# Altium PCB mini_drone.PcbDoc
Units mm, origin at the board's own origin, x right, y up, seen from the top; angles counter-clockwise.
Board outline 53.26 x 58.04 mm, 2 copper layers (Top Layer, Bottom Layer), stack 1.57 mm thick; 31 components, 18 nets, 90 pads, 0 vias.
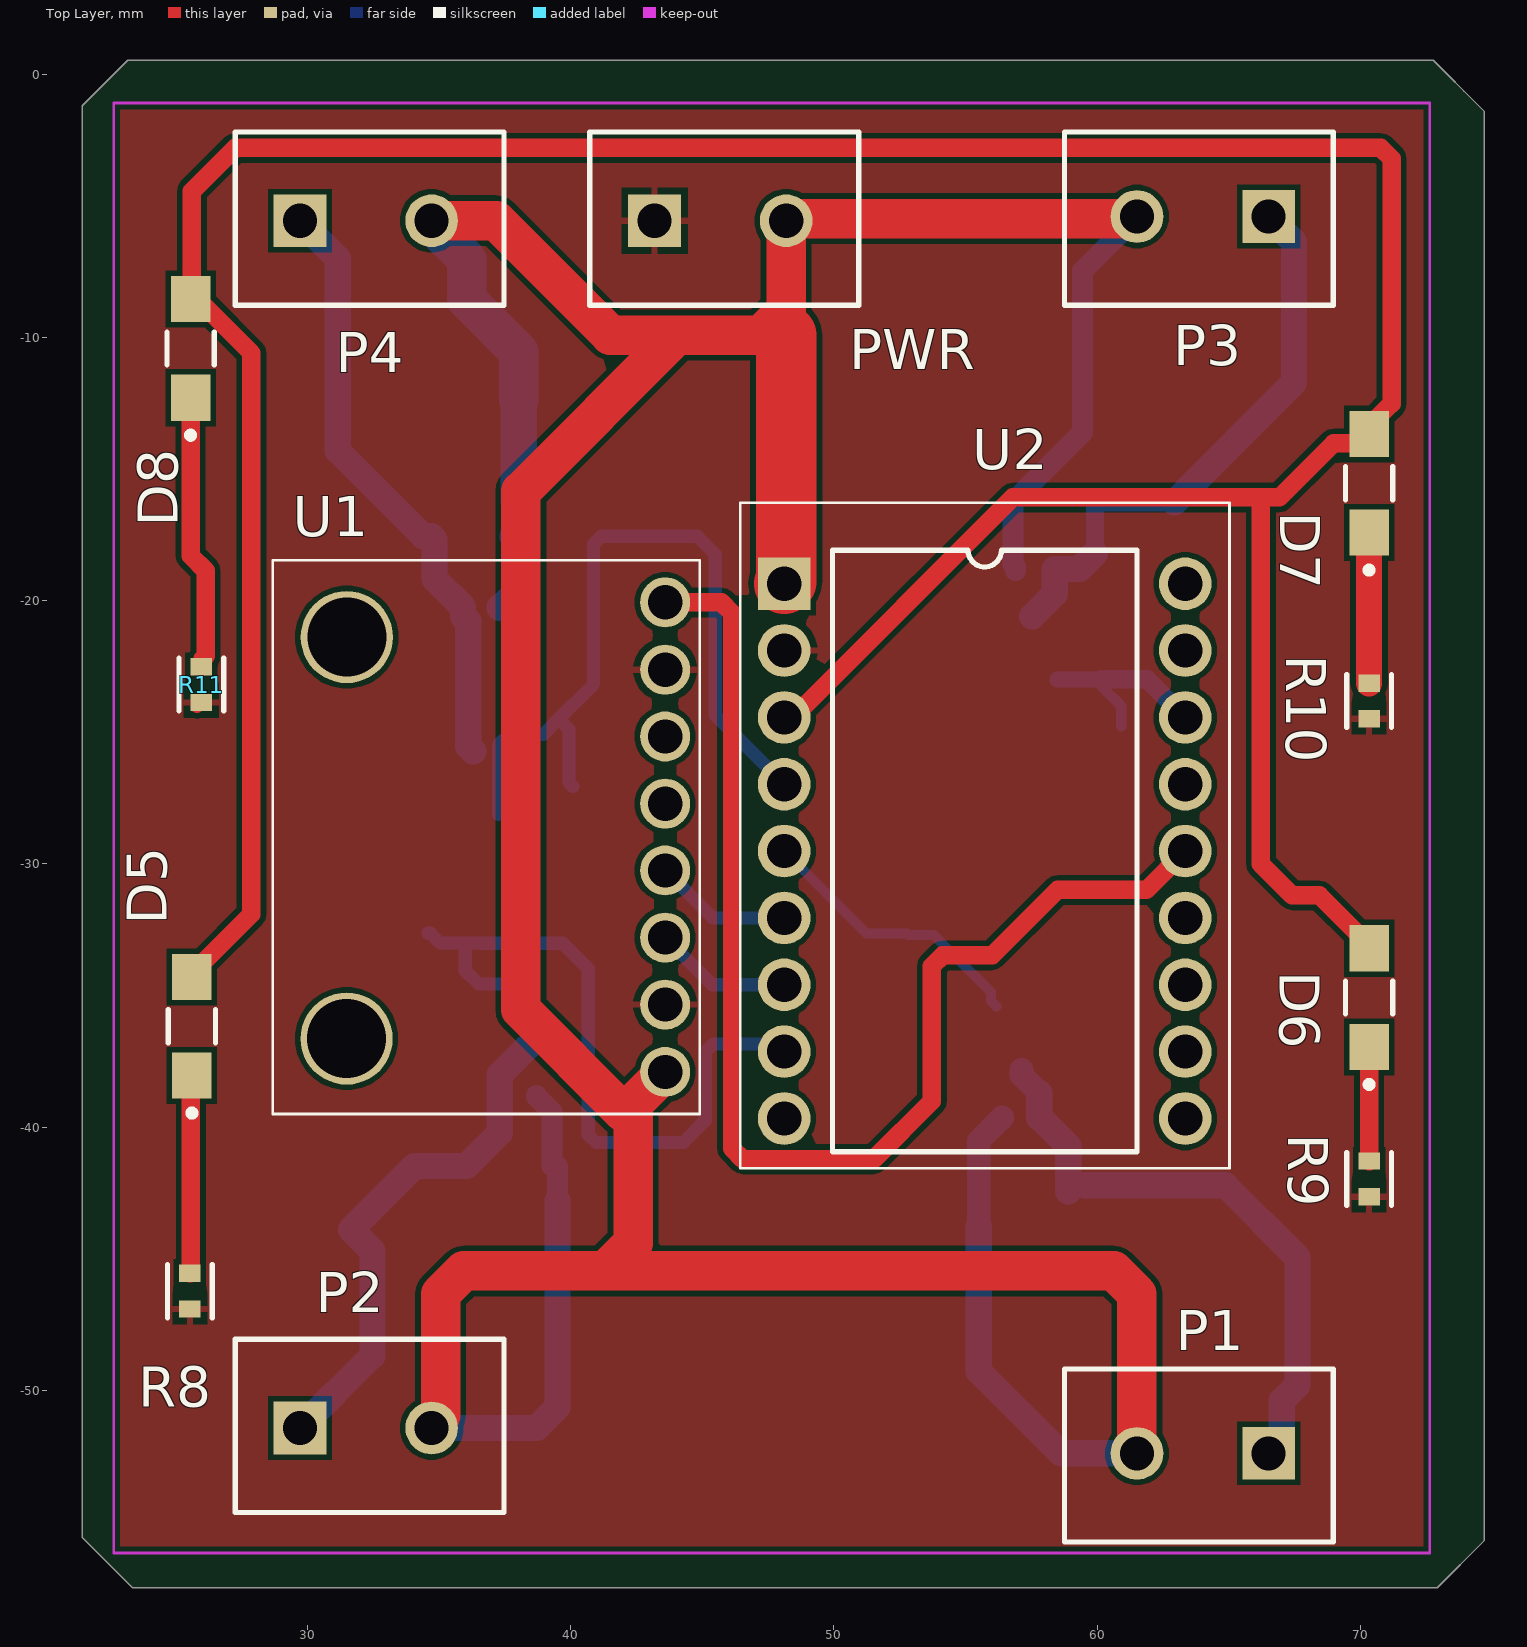
[diagram p0: Top Layer view]
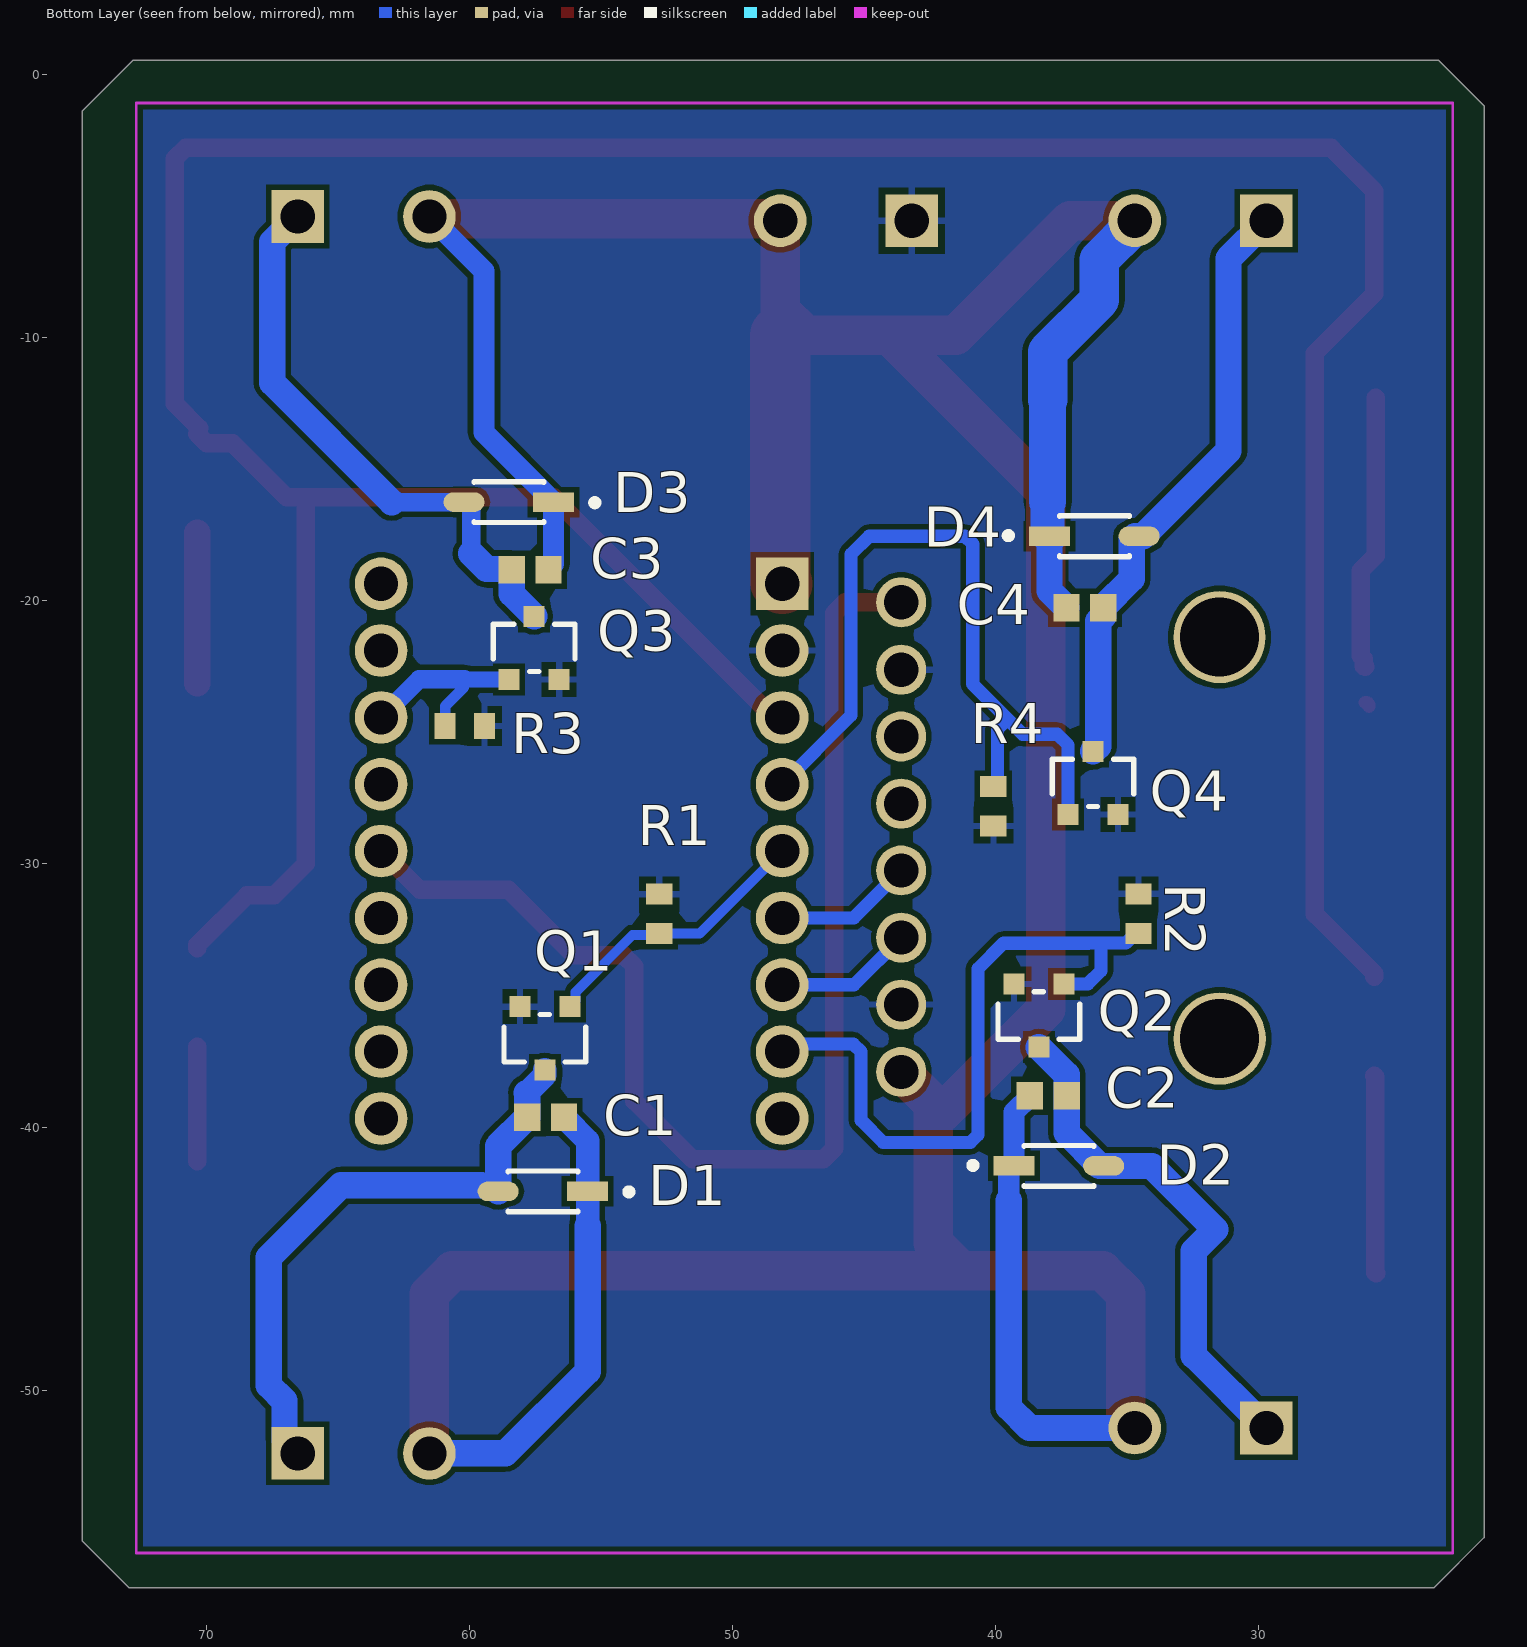
[diagram p1: Bottom Layer view, seen from below]

## Layer stack, top to bottom
Board Layer Stack Top Solder: solder mask 0.01, SM-001, Dk 4
Top Layer: signal copper 0.035
Dielectric 1: core 1.5, FR-4, Dk 4.6
Bottom Layer: signal copper 0.035
Board Layer Stack Bottom Solder: solder mask 0.01, SM-001, Dk 4

## Board outline
23.343,-57.506 21.438,-55.601 21.438,-1.194 23.165,0.533 72.771,0.533 73.304,0 73.939,-0.635 74.701,-1.397 74.701,-55.728 72.923,-57.506

## Design rules (kind name [scope] priority, off if disabled: settings)
Clearance [All] p1: gap=0.2 ignorepadtopadclearanceinfootprint=FALSE
HoleSize [All] p1: absolutevalues=TRUE maxlimit=5 minlimit=0.15 maxpercent=80.000 minpercent=20.000
MinimumSolderMaskSliver [All] p1: minsoldermaskwidth=0.05
PolygonConnect [All] p1: connectstyle=Relief reliefconductorwidth=0.254 reliefentries=4 polygonreliefangle="90 Angle" airgapwidth=0.254
RoutingVias [All] p1: holewidth=0.711 width=1.27 viastyle="Through Hole" minholewidth=0.38 minwidth=0.3 maxholewidth=0.711 maxwidth=1.27
SilkToSilkClearance [All] p1: silktosilkclearance=0.15
SilkToSolderMaskClearance [IsPad] p1: minsilkscreentomaskgap=0.15 clearancetoexposedcopper=TRUE
SolderMaskExpansion [All] p1: expansion=0.038 istentingtop=FALSE
SupplyNets "Schematic Supply Nets_2" [InNet('3.7v')] p1: voltage=0.000
SupplyNets "Schematic Supply Nets_1" [InNet('GND')] p2: voltage=0.000
SupplyNets "Schematic Supply Nets" [InNet('3.3v')] p3: voltage=0.000
UnRoutedNet [All] p1: checkbadconnections=TRUE
Width [All] p1: maxlimit=7 minlimit=0.38 preferedwidth=0.4
25 further rules are at their usual default settings.

## Components (designator, comment, footprint, x,y, rotation, side; value= is the part's Value field where it differs from the comment)
C1 "GRM188R71C104KA01D" MURA-0603_H_0.9_M 57.099,-39.624 r180 bottom
C2 "GRM188R71C104KA01D" MURA-0603_H_0.9_M 37.998,-38.811 r0 bottom
C3 "GRM188R71C104KA01D" MURA-0603_H_0.9_M 57.683,-18.821 r180 bottom
C4 "GRM188R71C104KA01D" MURA-0603_H_0.9_M 36.601,-20.269 r0 bottom
D1 "1N5819HW-7-F" FP-SOD123-IPC_A 57.201,-42.443 r0 bottom
D2 "1N5819HW-7-F" FP-SOD123-IPC_A 37.592,-41.478 r180 bottom
D3 "1N5819HW-7-F" FP-SOD123-IPC_A 58.496,-16.256 r0 bottom
D4 "1N5819HW-7-F" FP-SOD123-IPC_A 36.246,-17.551 r180 bottom
D5 "APT3216LSECK/J4-PRV" FP-APT3216LSECK-J4-PRV-MFG 25.603,-36.17 r90 top
D6 "APT3216LSECK/J4-PRV" FP-APT3216LSECK-J4-PRV-MFG 70.333,-35.082 r90 top
D7 "APT3216LSECK/J4-PRV" FP-APT3216LSECK-J4-PRV-MFG 70.333,-15.54 r90 top
D8 "APT3216LSECK/J4-PRV" FP-APT3216LSECK-J4-PRV-MFG 25.552,-10.414 r90 top
P1 "KF127-5.0-2P" CONNECTOR 63.712,-52.4 r180 top
P2 "KF127-5.0-2P" CONNECTOR 32.512,-51.435 r0 top
P3 "KF127-5.0-2P" CONNECTOR 63.712,-5.404 r180 top
P4 "KF127-5.0-2P" CONNECTOR 32.512,-5.563 r0 top
PWR "KF127-5.0-2P" CONNECTOR 45.985,-5.563 r0 top
Q1 "AO3400A" FP-SOT23-MFG 57.125,-36.627 r270 bottom
Q2 "AO3400A" FP-SOT23-MFG 38.354,-35.763 r270 bottom
Q3 "AO3400A" FP-SOT23-MFG 57.531,-21.793 r90 bottom
Q4 "AO3400A" FP-SOT23-MFG 36.297,-26.924 r90 bottom
R1 "Resistor 0R +/- 5% 0603 100 mW" RESC1608X55X25ML10T15 52.781,-31.902 r90 bottom value=10k
R2 "Resistor 0R +/- 5% 0603 100 mW" RESC1608X55X25ML10T15 34.569,-31.889 r90 bottom value=10k
R3 "Resistor 0R +/- 5% 0603 100 mW" RESC1608X55X25ML10T15 60.168,-24.765 r180 bottom value=10k
R4 "Resistor 0R +/- 5% 0603 100 mW" RESC1608X55X25ML10T15 40.081,-27.813 r270 bottom value=10k
R8 "RC0603JR-0722RL" FP-RC0603-0_55-IPC_C 25.527,-46.237 r90 top
R9 "RC0603JR-0722RL" FP-RC0603-0_55-IPC_C 70.333,-41.97 r90 top
R10 "RC0603JR-0722RL" FP-RC0603-0_55-IPC_C 70.333,-23.809 r90 top
R11 "RC0603JR-0722RL" FP-RC0603-0_55-IPC_C 25.959,-23.19 r90 top
U1 "MPU6050" MPU6050 43.608,-28.712 r90 top locked
U2 "ESP32-S3-ZERO" ESP32-S3-ZERO-DIP 48.108,-19.355 r0 top locked

## Footprints (in the part's own frame and the unit in brackets; to place one, negate y for a bottom-side part, rotate by r counter-clockwise, add the part's x,y. Pads: shape width x height; smd on the part's side, far side on the other; paste and mask are expansions set on the pad)
CONNECTOR [mm]
  rect 2x2 hole 1.3: 1(-2.803,0)
  round 2 hole 1.3: 2(2.199,0)
  silkscreen extent -5.26,-3.21 4.95,3.37
ESP32-S3-ZERO-DIP [mm]
  rect 2x2 hole 1.3: 1(0,0)
  round 2 hole 1.3: 2(0,-2.54) 3(0,-5.08) 4(0,-7.62) 5(0,-10.16) 6(0,-12.7) 7(0,-15.24) 8(0,-17.78) 9(0,-20.32) 10(15.24,-20.32) 11(15.24,-17.78) 12(15.24,-15.24) 13(15.24,-12.7) 14(15.24,-10.16) 15(15.24,-7.62) 16(15.24,-5.08) 17(15.24,-2.54) 18(15.24,0)
  silkscreen extent -1.67,-22.22 16.92,3.08, body extent -1.38,-21.91 16.62,2.84, height 7.2
FP-APT3216LSECK-J4-PRV-MFG [mm]
  rect 1.75x1.5 smd paste+0 mask+0: 1(-1.875,0) 2(1.875,0)
  silkscreen extent -3.42,-0.9 0.63,0.9, body extent -2.85,-1 2.85,1, height 0.25
FP-RC0603-0_55-IPC_C [mm]
  rect 0.659x0.812 smd paste+0 mask+0: 1(-0.677,0) 2(0.677,0)
  silkscreen extent -1.01,-0.85 1.01,0.85, body extent -1.11,-0.55 1.11,0.55, height 0.25
FP-SOD123-IPC_A [mm]
  rect 1.557x0.742 smd paste+0 mask+0: 1(-1.7,0)
  rrect100% 1.557x0.742 smd paste+0 mask+0: 2(1.7,0)
  silkscreen extent -3.39,-0.77 1.33,0.77, body extent -1.83,-0.77 1.83,0.77, height 1.45
FP-SOT23-MFG [mm]
  rect 0.8x0.8 smd paste+0 mask+0: 1(-1.2,0.95) 2(-1.2,-0.95) 3(1.2,0)
  silkscreen extent -0.9,-1.55 0.9,1.55, body extent -1.41,-1.45 1.41,1.45, height 1.25
MPU6050 [mm]
  round 1.9 hole 1.3: 1(-9.195,0.022) 2(-6.636,0.022) 3(-4.091,0.022) 4(-1.539,0.022) 5(0.998,0.022) 6(3.552,0.022) 7(6.09,0.022) 8(8.649,0.022)
  round 3.5 hole 3: 40(-7.929,12.126) 41(7.327,12.12)
  silkscreen extent -10.79,-1.29 10.24,14.94, body extent -10.74,-1.23 10.26,14.92, height 6.21
MURA-0603_H_0.9_M [mm] "SMD, 2-Leads, Body 1.7x0.9mm, IPC Low Density"
  rect 1x1.05 smd: 1(-0.7,0) 2(0.7,0)
  body extent -0.85,-0.45 0.85,0.45, height 0.9
RESC1608X55X25ML10T15 [mm] "Chip Resistor, 2-Leads, Body 1.70x0.90mm, IPC Low Density"
  rect 0.8x1 smd: 1(-0.75,0) 2(0.75,0)
  body extent -0.85,-0.45 0.85,0.45, height 0.55

## Part data
C1 C2 C3 C4: library part CMP-2000-05253-1, "CAP, Ceramic, 0.1 uF, 10%, 16 V, 0603, RoHS, Tape and Reel", Capacitance=0.1uF, Capacitance - nF=100nF, Capacitance - pF=100000pF, Case Code - in=0603, Case Code - mm=1608, Case Height=0.8mm, Case Length=1.6mm, Dielectric=X7R, Manufacturer=Murata, Maximum Operating Temperature=+125C, Minimum Operating Temperature=-55C, Operating Temperature Range=-55Cto+125C, Package / Case=0603(1608metric), Temperature Coefficient / Code=+/-15%, Tolerance=10%, Voltage Rating=16V, Brand=MurataElectronics, Case Width=0.8mm, Datasheet URL=https://datasheet.ciiva.com/29202/451467-da-01-en-vs-kondensator-0603-29202287.pdf, Datasheet Version=Dec-10, Dimensions=0.8mmWx1.6mmLx0.8mmH, Factory Pack Quantity=4000, Manufacturer URL=http://www.murata.com/, Packaging=Reel, Product=GeneralTypeMLCCs, Product Category=MultilayerCeramicCapacitorsMLCC-SMD/SMT, RoHS=Details, Series=GRM, Termination Style=SMD/SMT, Type=GeneralPurposeMLCC, Voltage Rating DC=16V
D1 D2 D3 D4: library part CMP-0303-00003-3, "DIODE SCHOTTKY 40V 1A SOD123", Average Rectified Current=1A, Capacitance=110pF, Case/Package=SOD-123-2, Forward Voltage=450mV, Max Forward Surge Current (Ifsm)=25A, Max Operating Temperature=125°C, Max Power Dissipation=450mW, Max Repetitive Reverse Voltage (Vrrm)=40V, Min Operating Temperature=-65°C, Package Quantity=3000, Peak Reverse Current=50uA, Contact Plating=Tin, Current Rating=1A, Element Configuration=Single, Forward Current=1A, Height=1.25mm, Lead Free="Lead Free", Length=2.85mm, Max Reverse Voltage (DC)=40V, Number of Pins=2, Output Current=1A, Packaging="Tape and Reel", Peak Non-Repetitive Surge Current=25A, Polarity=Standard, Radiation Hardening=No, REACH SVHC="No SVHC", Termination=SMD/SMT, Voltage Rating (DC)=40V, Weight=0.000353oz, Width=1.7mm
D5 D6 D7 D8: library part CMP-44529-000067-1, "LED ORANGE CLEAR 2SMD", Case Code (Imperial)=1206, Case Code (Metric)=3216, Color=Orange, Forward Voltage=1.8V, Lens Color=Colorless, Test Current=2mA, Case/Package=1206, Dominant Wavelength=605nm, Height=0.75mm, Length=3.2mm, Lens Transparency=Clear, Luminous Intensity=50mcd, Mount="Surface Mount", Packaging="Tape and Reel", RoHS Compliant=Yes, Viewing Angle=120°, Width=1.6mm
P1 P2 P3 P4 PWR: library part connector
Q1 Q2 Q3 Q4: library part CMP-83955-000006-1, "MOSFET N-CH 30V 5.7A SOT23", Case/Package=SOT-23, Continuous Drain Current (ID)=5.7A, Drain to Source Voltage (Vdss)=30V, Gate to Source Voltage (Vgs)=12V, Input Capacitance=630pF, Max Operating Temperature=150°C, Max Power Dissipation=1.4W, Min Operating Temperature=-55°C, Lead Free="Lead Free", Mount="Surface Mount", Number of Elements=1, Number of Pins=3, Packaging="Tape and Reel", Power Dissipation=1.4W, Radiation Hardening=No, Rds On Max=26.5mR
R1 R2 R3 R4: library part CMP-009-00006-5, "Chip Resistor, 0 Ohm, 0.1 W, -55 to 155 degC, 0603 (1608 Metric)", Case/Package=0603, Max Operating Temperature=155°C, Min Operating Temperature=-55°C, Power=100mW, Tolerance=5%, Voltage Rating=50V, Mounting Technology=SM, Pins=2, RoHS Compliant=True
R8 R9 R10 R11: library part CMP-03412-037819-1, "RES SMD 22 OHM 5% 1/10W 0603", Case Code (Imperial)=0603, Case Code (Metric)=1608, Max Operating Temperature=155°C, Max Power Dissipation=100mW, Min Operating Temperature=-55°C, Resistance=22R, Resistance Tolerance=5%, Resistor Type="Thick Film", Temperature Coefficient=100ppm/°C, Voltage Rating=50V, Case/Package=0603, Construction=Rectangular, Depth=0.8mm, Features="Moisture Resistant", Lead Free="Lead Free", Length=1.6mm, Military Standard=Not, Number of Pins=2, Number of Terminations=2, Packaging="Tape and Reel", Power Rating=100mW, REACH SVHC="No SVHC", RoHS Compliant=Yes, Series=RC, Size Code=0603, Termination=SMD/SMT, Tolerance=5%, Voltage Rating (DC)=50V, Width=0.8mm
U2: library part esp32s3-zero

## Nets (pads, with @x,y where several pads share a name; then routed paths per layer and width w, separated by ;. In a path a pad name is that pad's centre, name@x,y a point inside that pad or via, vN(x,y) a via of type N, cw(c..) or ccw(c..) an arc to the next point about the centre after c; other vN are vias at no path point)
3.3v: D5.2 D6.2 D7.2 D8.2 U2.3 | length 134.9
  Top Layer w0.7: D5.2 25.603,-34.17 27.864,-31.909 27.864,-10.594 25.603,-8.334 25.603,-4.44 27.249,-2.794 70.778,-2.794 71.188,-3.204 71.188,-12.512 D7.2@70.246,-13.454 ; U2.3 48.438,-24.435 56.794,-16.078 66.218,-16.078 ; D6.2 70.333,-33.082 68.448,-31.198 67.412,-31.198 66.218,-30.004 66.218,-16.078 ; D7.2 69.973,-14.025 68.982,-14.025 66.929,-16.078 66.218,-16.078
3.7v: C1.2 C2.2 C3.2 C4.2 D1.1 D2.1 D3.1 D4.1 P1.2 P2.2 P3.2 P4.2 PWR.2 U1.1 U2.1 | length 189.3
  Top Layer w1.5: P2.2 34.711,-51.3 35.052,-50.959 35.052,-46.345 35.931,-45.466 60.635,-45.466 61.513,-46.345 P1.2 ; P4.2 37.16,-5.563 41.504,-9.906 44.044,-9.906 ; 41.489,-45.288 42.367,-44.41 42.367,-39.126 ; U1.1 42.367,-39.126 ; P3.2 61.434,-5.483 48.263,-5.483 PWR.2 48.184,-8.951 47.229,-9.906 44.044,-9.906 ; 42.367,-39.126 42.029,-39.464 38.1,-35.535 38.1,-15.85 44.044,-9.906
  Top Layer w2.3: U2.1 48.184,-19.279 48.184,-9.906
  Bottom Layer w0.8: C2.2 38.698,-38.836 39.292,-39.43 D2.1 39.468,-41.478 39.497,-41.507 39.497,-42.799 ; C3.2@56.906,-18.846 56.906,-18.719 56.796,-18.609 D3.1 59.436,-13.616 59.436,-7.481 P3.2
  Bottom Layer w0.9: 55.499,-43.764 55.499,-42.445 D1.1 55.5,-40.523 56.324,-39.699 56.349,-39.699 56.399,-39.649 C1.2
  Bottom Layer w1: P2.2 38.71,-51.435 39.497,-50.648 39.497,-42.799 ; C4.2 37.301,-20.244 37.335,-20.21 37.36,-20.21 37.946,-19.624 D4.1 ; 55.499,-43.764 55.499,-49.276 58.623,-52.4 P1.2
  Bottom Layer w1.3: D4.1 38.02,-17.477 38.02,-16.24
  Bottom Layer w1.4: 38.02,-16.24 38.02,-12.37
  Bottom Layer w1.5: P4.2 34.711,-5.698 36.054,-7.04 36.054,-8.574 38.02,-10.541 38.02,-12.37
GND: PWR.1 Q1.2 Q2.2 Q3.2 Q4.2 R1.2 R2.2 R3.2 R4.2 R8.1 R9.1 R10.1 R11.1 U1.2 U1.7 U2.2 | length 0.5
  Top Layer w0.5: R11.1@25.803,-24.023 25.803,-23.946 25.882,-23.867 R11.1
  Top Layer w1: U1.7 U1.7@43.83,-22.622
GPIO1: Q4.1 R4.1 U2.4 | length 30.2
  Bottom Layer w0.5: Q4.1 37.247,-25.482 37.653,-25.076 38.965,-25.076 39.454,-24.587 ; R4.1 40.079,-27.063 39.929,-26.913 39.929,-24.88 39.636,-24.587 39.454,-24.587 ; U2.4 45.491,-24.359 45.491,-18.237 44.806,-17.551 41.161,-17.551 40.869,-17.844 40.869,-23.172 39.454,-24.587
GPIO2: Q1.1 R1.1 U2.5 | length 10.7
  Bottom Layer w0.38: U2.5 51.245,-32.652 R1.1 52.837,-32.708 53.795,-32.708 55.965,-34.878 55.965,-35.217 Q1.1
GPIO5: Q2.1 R2.1 U2.8 | length 26.4
  Bottom Layer w0.5: R2.1 34.669,-32.639 35.044,-33.014 35.992,-33.014 ; 36.474,-33.02 39.7,-33.02 40.665,-33.985 40.665,-40.296 40.958,-40.589 44.272,-40.589 45.11,-39.751 45.11,-37.141 45.403,-36.848 47.821,-36.848 U2.8 ; 36.474,-33.014 35.992,-33.014 ; Q2.1 36.494,-34.563 35.992,-34.061 35.992,-33.014
GPIO11: U1.8 U2.14 | length 48.3
  Top Layer w0.7: U1.8 45.716,-20.063 46.126,-20.473 46.126,-40.815 46.536,-41.225 51.511,-41.225 53.721,-39.014 53.721,-33.887 54.131,-33.477 56.007,-33.477 58.496,-30.988 61.874,-30.988 U2.14
GPIO13: Q3.1 R3.1 U2.16 | length 7.5
  Bottom Layer w0.4: 60.198,-23.012 60.198,-23.292 60.909,-24.003 60.909,-24.756 R3.1
  Bottom Layer w0.6: Q3.1 60.179,-22.993 60.198,-23.012
  Bottom Layer w0.7: 60.179,-22.993 61.906,-22.993 U2.16
M1-: C1.1 D1.2 P1.1 Q1.3 | length 22.5
  Bottom Layer w0.9: Q1.3 57.125,-38.024 57.81,-38.71
  Bottom Layer w1: 57.81,-38.71 57.799,-38.721 C1.1 57.799,-39.649 57.824,-39.649 58.901,-40.726 D1.2 ; D1.2@59.537,-42.215 64.872,-42.215 67.612,-44.955 67.612,-49.809 67.016,-50.406 67.016,-51.9 P1.1
M2-: C2.1 D2.2 P2.1 Q2.3 | length 19.9
  Bottom Layer w1: P2.1 32.452,-48.692 32.466,-48.692 32.466,-44.709 31.648,-43.891 34.061,-41.478 D2.2 36.042,-41.478 37.298,-40.221 C2.1 37.298,-38.019 Q2.3
M3-: C3.1 D3.2 P3.1 Q3.3 | length 22
  Bottom Layer w0.7: 59.918,-18.211 59.918,-16.385 60.047,-16.256 62.941,-16.256
  Bottom Layer w1: Q3.3 58.383,-19.741 C3.1 58.383,-18.796 59.332,-18.796 59.918,-18.211 ; 62.941,-16.256 67.483,-11.715 67.483,-6.371 P3.1
M4-: C4.1 D4.2 P4.1 Q4.3 | length 23.1
  Bottom Layer w1: P4.1 31.146,-6.999 31.146,-14.302 34.395,-17.551 D4.2 34.695,-17.551 34.824,-17.68 34.824,-19.167 35.901,-20.244 35.901,-20.587 36.101,-20.787 36.101,-25.529 Q4.3
NetD5_1: D5.1 R8.2 | length 7.6
  Top Layer w0.7: R8.2 25.544,-45.56 25.565,-45.54 25.565,-38.083 D5.1
NetD6_1: D6.1 R9.2 | length 4.3
  Top Layer w0.7: R9.2 D6.1
NetD7_1: D7.1 R10.2 | length 5.7
  Top Layer w1: R10.2 D7.1
NetD8_1: D8.1 R11.2 | length 10.6
  Top Layer w0.7: D8.1 25.552,-18.288 26.126,-18.862 26.126,-22.103 26.015,-22.215 26.015,-22.493 25.979,-22.493 R11.2
SCL: U1.3 U2.7 | length 5.3
  Bottom Layer w0.5: U1.3 45.378,-34.595 U2.7
SDA: U1.4 U2.6 | length 5.3
  Bottom Layer w0.5: U1.4 45.39,-32.055 U2.6
pads on no net: U1.5 U1.6 U1.40 U1.41 U2.9 U2.10 U2.11 U2.12 U2.13 U2.15 U2.17 U2.18

## Polygon pours and split planes (outlines as drawn)
GND on Bottom Layer "GND_L02_P000" (solid, pour order 0): 22.631,-1.092 22.606,-1.118 22.606,-56.185 72.593,-56.185 72.644,-56.134 72.619,-56.109 72.619,-1.092
GND on Top Layer "GND_L01_P001" (solid, pour order 1): 22.657,-1.092 22.631,-1.118 22.631,-56.185 72.619,-56.185 72.644,-56.159 72.644,-1.092 22.631,-1.092

## Keep-outs
Keep-Out Layer:
  lines w0.1: 22.631,-56.185 22.631,-1.092 72.644,-1.092 72.644,-56.185 22.631,-56.185

## Silkscreen, mask and mechanical layers (free items; w line width, h text height)
Mechanical 1:
  lines w0.2: 21.438,-55.601 23.343,-57.506 72.923,-57.506 74.701,-55.728 74.701,-44.044 74.701,-1.397 73.939,-0.635 73.304,0 72.771,0.533 23.165,0.533 21.438,-1.194 21.438,-55.601
Mechanical 13:
  lines w0.254: 27.61,-2004.226 28.658,-2005.274